# Altium PCB pmu.PcbDoc
Units mil, origin at the board's own origin, x right, y up, seen from the top; angles counter-clockwise.
Board outline 1870 x 900 mil, 2 copper layers (Top Layer, Bottom Layer); 14 components, 9 nets, 38 pads, 0 vias.
Unrouted connection lines stored in the file: 29.
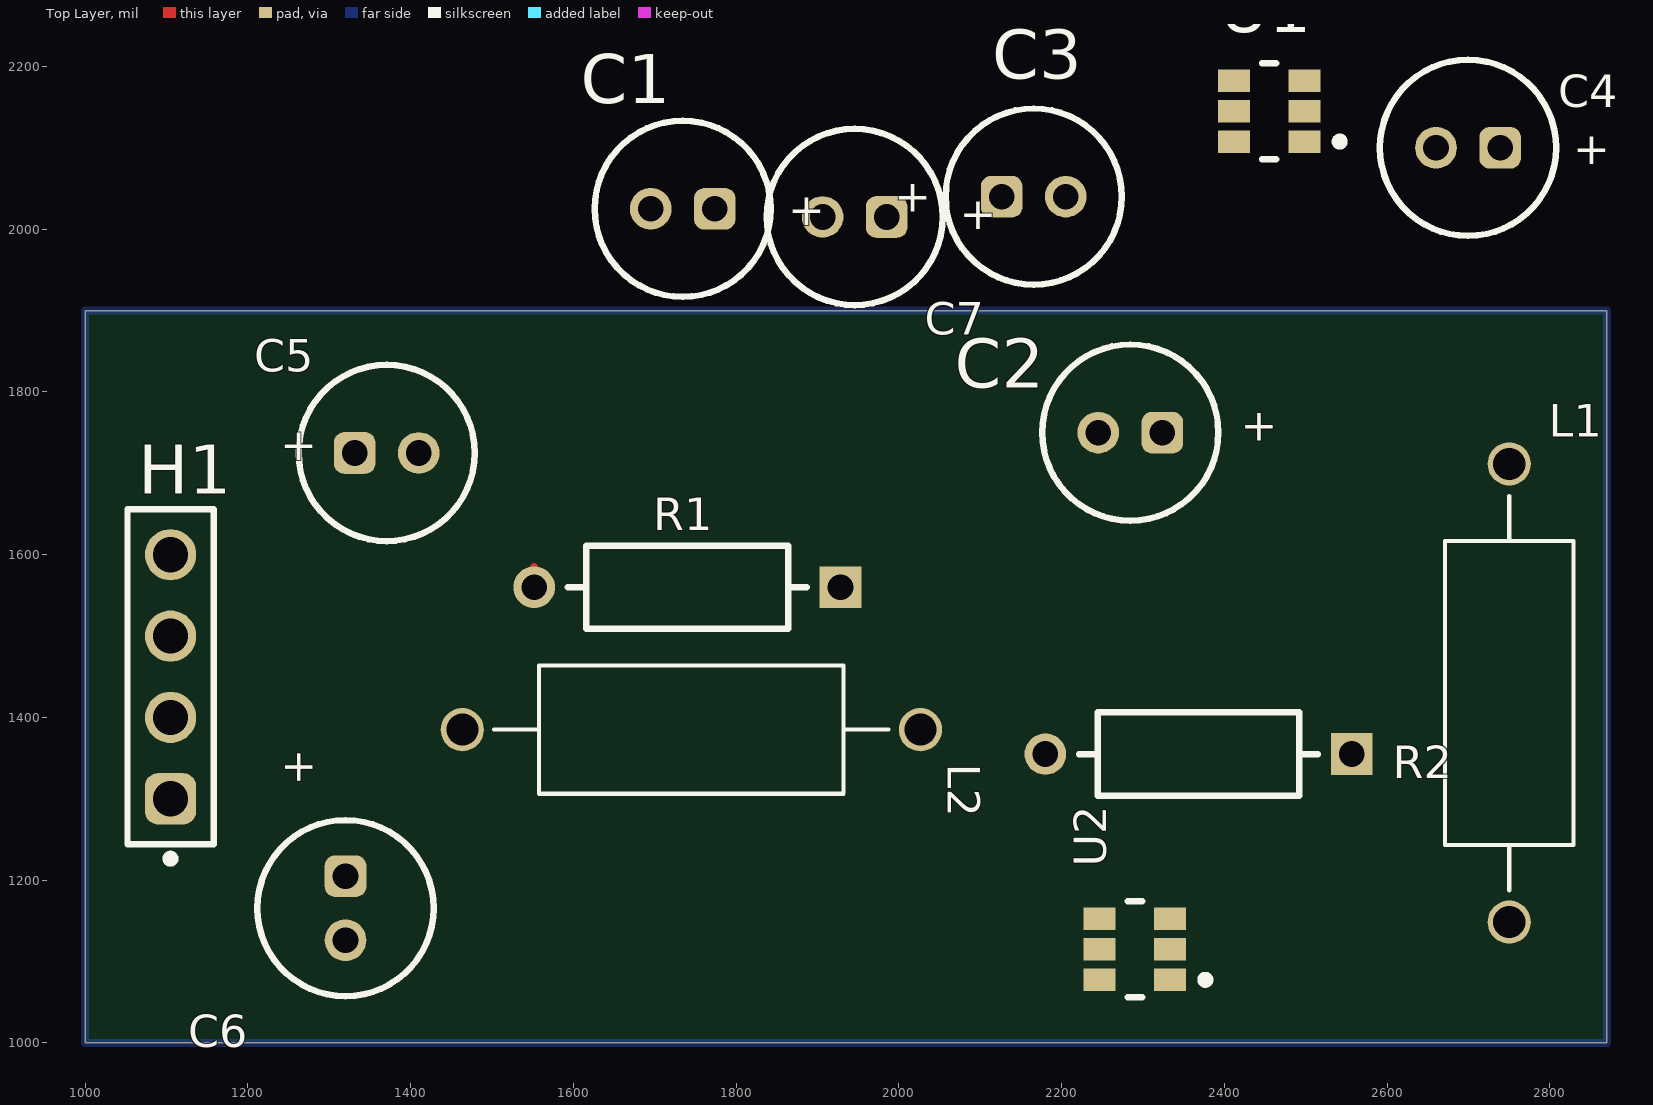
[diagram p0: Top Layer view]
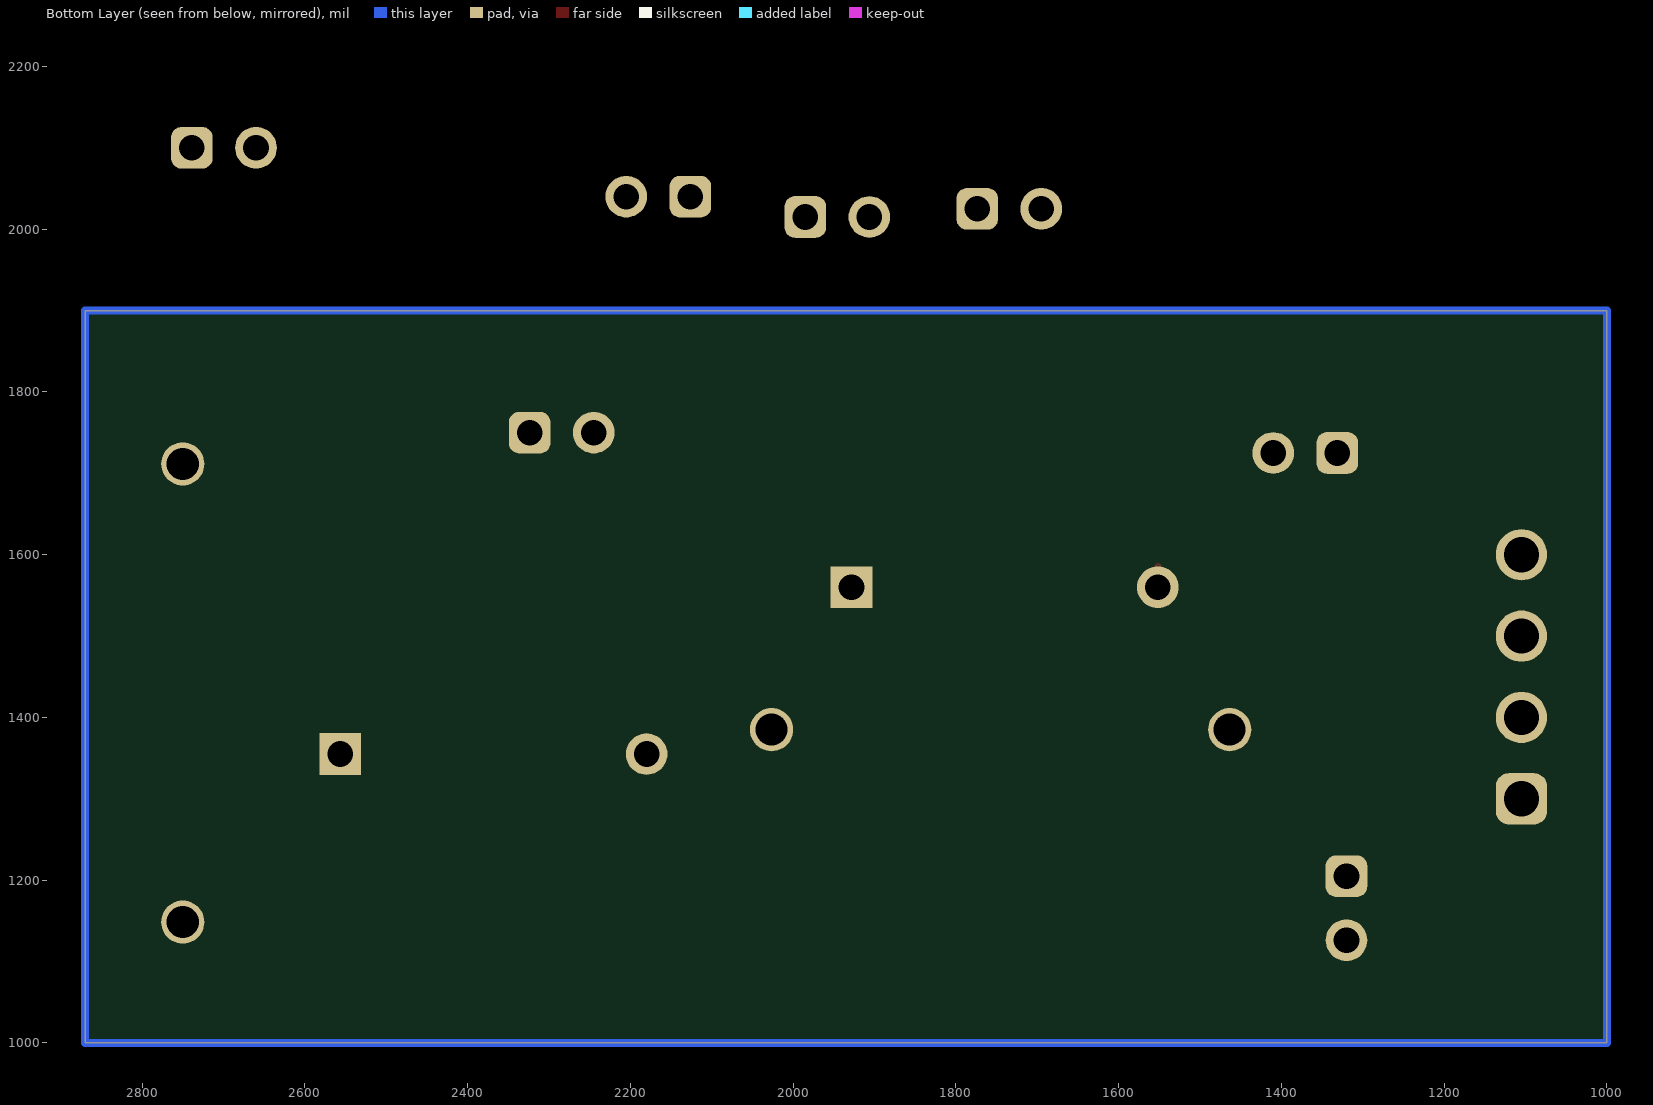
[diagram p1: Bottom Layer view, seen from below]

## Layer stack, top to bottom
Top Solder: solder mask 0.4, Solder Resist, Dk 3.5
Top Layer: signal copper 1.4
Dielectric 1: dielectric 12.6, FR-4, Dk 4.8
Bottom Layer: signal copper 1.4
Bottom Solder: solder mask 0.4, Solder Resist, Dk 3.5

## Board outline
1000,1000 2870,1000 2870,1900 1000,1900

## Design rules (kind name [scope] priority, off if disabled: settings)
Clearance [All] p1: gap=10 ignorepadtopadclearanceinfootprint=FALSE
PolygonConnect [All] p1: connectstyle=Relief reliefconductorwidth=10 reliefentries=4 polygonreliefangle="90 Angle" airgapwidth=10
RoutingVias [All] p1: holewidth=28 width=50 viastyle="Through Hole" minholewidth=28 minwidth=50 maxholewidth=28 maxwidth=50
SolderMaskExpansion [All] p1: expansion=4 istentingtop=FALSE
SupplyNets "Schematic Supply Nets" [InNet('GND')] p1: voltage=0.000
Width [All] p1: maxlimit=10 minlimit=10 preferedwidth=10
30 further rules are at their usual default settings.

## Classes and differential pairs
component class pmu: C1 C2 C3 C4 C5 C6 C7 H1 L1 L2 R1 R2 U1

## Components (designator, comment, footprint, x,y, rotation, side; value= is the part's Value field where it differs from the comment)
C1 "860020672005" WCAP-ATG5_D5H11 51734.37,52025 r0 top
C2 "860020672005" WCAP-ATG5_D5H11 52284.37,51750 r0 top
C3 "860020672005" WCAP-ATG5_D5H11 -47834.37,-47960 r180 top
C4 "860020672005" WCAP-ATG5_D5H11 52699.37,52100 r0 top
C5 "860020672005" WCAP-ATG5_D5H11 -48629.37,-48275 r180 top
C6 "860020672005" WCAP-ATG5_D5H11 -48680,51165.63 r90 top
C7 "860020672005" WCAP-ATG5_D5H11 51945.63,52015 r0 top
H1 "61300411121" 61300411121 1105,1450 r90 top locked
L1 "B78108E1472K009" INDAD1430W80L950D400 2750,1430 r90 top
L2 "B78108E1472K009" INDAD1430W80L950D400 1745,1385 r180 top
R1 "PCF14JT7K50" FP-CF14-MFG 1740,1560 r180 top
R2 "PCF14JT7K50" FP-CF14-MFG 2368.19,1355 r180 top
U1 "AP63205WU-7" FP-TSOT26-MFG 2455,2145 r180 top
U2 "AP63200WU-7" FP-TSOT26-MFG 2290,1115 r180 top

## Footprints (in the part's own frame and the unit in brackets; to place one, negate y for a bottom-side part, rotate by r counter-clockwise, add the part's x,y. Pads: shape width x height; smd on the part's side, far side on the other; paste and mask are expansions set on the pad)
61300411121 [mm] "Pin Header, pitch 2.54 mm, THT, Vertical, single row, 4p"
  rrect50% 1.6x1.6 hole 1.1: 1(-3.81,0)
  round 1.6 hole 1.1: 2(-1.27,0) 3(1.27,0) 4(3.81,0)
  silkscreen extent -5.8,-1.35 5.23,1.35, body extent -5.08,-1.27 5.08,1.27, height 8.57
FP-CF14-MFG [mm]
  rect 1.3x1.3 hole 0.8 paste-2539.97 mask+0: 1(-4.78,0)
  round 1.3 hole 0.8 paste-2539.97 mask+0: 2(4.78,0)
  silkscreen extent -3.73,-1.3 3.73,1.3, body extent -5.53,-1.4 5.53,1.4, height 0.25
FP-TSOT26-MFG [mm]
  rect 1x0.7 smd paste+0 mask+0: 1(-1.099,0.95) 2(-1.099,0) 3(-1.099,-0.95) 4(1.099,-0.95) 5(1.099,0) 6(1.099,0.95)
  silkscreen extent -2.33,-1.5 0.22,1.5, body extent -1.7,-1.6 1.7,1.6, height 0.25
INDAD1430W80L950D400 [mm]
  round 1.35 hole 1: 1(-7.15,0) 2(7.15,0)
  silkscreen extent -6.15,-2 6.15,2, body extent -7.55,-2 7.55,2, height 4
WCAP-ATG5_D5H11 [mm] "Aluminum Electrolytic Capacitors, 5x11mm"
  rrect50% 1.3x1.3 hole 0.8: 1(-1269,-1270)
  round 1.3 hole 0.8: 2(-1271,-1270)
  silkscreen extent -1272.75,-1272.75 -1267.25,-1267.25, body extent -1272.49,-1272.5 -1267.5,-1267.5, height 11.31

## Part data
C1 C2 C3 C4 C5 C6 C7: library part CMP-03913-53914228-1, "860020672005 WCAP-ATG5 Aluminum Electrolytic Capacitors", Capacitance=1µF, Case/Package=Radial, ESR (Equivalent Series Resistance)=39.553Ω, Leakage Current=3µA, Max Operating Temperature=105°C, Min Operating Temperature=-40°C, Ripple Current=13mA, Tolerance=20%, Voltage Rating=50V, Diameter=5mm, Height=11mm, Height - Seated (Max)=12.4968mm, Hole Diameter=800µm, Lead Pitch=2.0066mm, Length=11mm, Life (Hours)=2000hours, Mount="Through Hole", NexarPartId=53914228, Packaging="Tape & Box (TB)", Pitch=2mm, Polarity=Polar, REACH SVHC=Unknown, RoHS=Compliant, Voltage Rating (DC)=50V
H1: "WR-PHD Pin Header, THT, Vertical, pitch 2.54mm, 1 Row, 4P", Contact Resistance=20mOhm, Manufacturer="Wurth Elektronik", Operating Temperature Max=105°C, Operating Temperature Min=-40°C, Rated Current=3A, Withstanding Voltage=500V, Working Voltage=250V, Category="Board-to-Board Connectors", ComponentLink1Description="Website Link", ComponentLink1URL=https://www.we-online.com/redexpert/article/61300411121?ad, ComponentLink2Description="Datasheet Link", ComponentLink2URL=https://www.we-online.com/redexpert/spec/61300411121?ad, Gender="Pin Header", Manufacturer Part Number=61300411121, Match Code=WR-PHD, Mount="Through Hole", Number of Pins=4, Number of Rows=1, Orientation=Vertical, Packaging=Bag, Pitch=2.54mm
L1 L2: "4.7 ÂµH Unshielded Drum Core, Wirewound Inductor 2.75 A 85mOhm Max Axial", Package=None, Check_prices=https://www.snapeda.com/parts/B78108E1472K009/EPCOS/view-part/?ref=eda, Digi-Key_Part_Number=495-76025-1-ND, MF=EPCOS, MP=B78108E1472K009, Purchase-URL=https://pricing.snapeda.com/search/part/B78108E1472K009/?ref=eda, SnapEDA_Link=https://www.snapeda.com/parts/B78108E1472K009/EPCOS/view-part/?ref=snap
R1 R2: library part CMP-26528-000003-1, "RES 7.5K OHM 1/4W 5% AXIAL", Case/Package=Axial, Max Operating Temperature=155°C, Max Power Dissipation=250mW, Min Operating Temperature=-55°C, Resistance=7.5kR, Resistor Type="Carbon Film", Temperature Coefficient=-400ppm/°C, Tolerance=5%, Contact Plating=Tin, Diameter=2.3mm, Features="Flame Retardant Coating", Lead Free="Lead Free", Length=0.256inch, Mount="Through Hole", Number of Terminations=2, Packaging="Tape and Reel", Power Rating=250mW, Radiation Hardening=No, RoHS Compliant=Yes, Series=CF
U1: library part CMP-12757-000001-1, "IC REG BUCK 5V 2A TSOT26", Ambient Temperature Range High=+85°C, Ambient Temperature Range Low=-40°C, Manufacturer="Diodes Inc.", Max Junction Temp=+160°C, Max Supply Voltage=32V, Min Supply Voltage=3.8V, Nominal Supply Current=22uA, Output Current=2A, Output Voltage=5V, Package=TSOT26, Switching Frequency=1100kHz, Temperature="-40°C to +85°C", Automotive=No, Category=IC, ComponentLink2Description=Datasheet, ComponentLink2URL=https://www.diodes.com/assets/Datasheets/AP63200-AP63201-AP63203-AP63205.pdf, Device Class L1="Integrated Circuits (ICs)", Device Class L2="Power Management ICs", Device Class L3="Voltage Regulators - Switching", Digikey Description="IC REG BUCK 5V 2A TSOT26", Footprint Url=https://www.diodes.com/assets/Package-Files/TSOT26.pdf, Height=1mm, Lead Free=Yes, Manufacturer Part Number=AP63205WU-7, Max Duty Cycle=100%, Number Of Outputs=1, Octopart=https://octopart.com/ap63205wu-7-diodes+inc.-98099551, Output Type=Fixed, RoHS=TRUE, Standoff Height=0.01mm, Switching Topology=Buck, Temperature Range High=+85°C, Temperature Range Low=-40°C
U2: library part CMP-12757-000010-1, "IC REG BUCK ADJUSTABLE 2A TSOT26", Ambient Temperature Range High=+85°C, Ambient Temperature Range Low=-40°C, Manufacturer="Diodes Inc.", Max Junction Temp=+160°C, Max Supply Voltage=32V, Min Supply Voltage=3.8V, Nominal Supply Current=22uA, Output Current=2A, Package=TSOT26, Switching Frequency=500kHz, Temperature="-40°C to +85°C", Automotive=No, Category=IC, ComponentLink2Description=Datasheet, ComponentLink2URL=https://www.diodes.com/assets/Datasheets/AP63200-AP63201-AP63203-AP63205.pdf, Device Class L1="Integrated Circuits (ICs)", Device Class L2="Power Management ICs", Device Class L3="Voltage Regulators - Switching", Digikey Description="IC REG BUCK ADJUSTABLE 2A TSOT26", Footprint Url=https://www.diodes.com/assets/Package-Files/TSOT26.pdf, Height=1mm, Ipc Land Pattern Name=SOT95P280X100-6, Lead Free=Yes, Manufacturer Part Number=AP63200WU-7, Mouser Description="AP63200 Series 1.2 V 2 A Adjustable Synchronous Buck Converter - TSOT-26", Number Of Outputs=1, Octopart=https://octopart.com/ap63200wu-7-diodes+inc.-98099548, Output Type=AdjustableProgrammable, RoHS=TRUE, Standoff Height=0.01mm, Switching Topology=Buck, Temperature Range High=+85°C, Temperature Range Low=-40°C

## Nets (pads, with @x,y where several pads share a name; then routed paths per layer and width w, separated by ;. In a path a pad name is that pad's centre, name@x,y a point inside that pad or via, vN(x,y) a via of type N, cw(c..) or ccw(c..) an arc to the next point about the centre after c; other vN are vias at no path point)
GND: C1.2 C2.2 C6.2 C7.2 H1.4 R2.1 U1.4 U2.4
NetC3_1: C3.1 U1.6
NetC3_2: C3.2 L1.1 U1.5
NetC4_1: C4.1 U2.6
NetC4_2: C4.2 L2.1 U2.5
NetC5_2: C5.2 R1.1 R2.2 U2.1
Vin: C1.1 C7.1 H1.3 U1.2 U1.3 U2.2 U2.3
Vout_a: C2.1 H1.1 L1.2 U1.1
Vout_b: C5.1 C6.1 H1.2 L2.2 R1.2 | length 25
  Top Layer w10: R1.2 R1.2@1551.81,1585
copper on no net: | length 5540
  Bottom Layer w10: 1000,1000 2870,1000 2870,1900 1000,1900 1000,1000

## Text inside footprints (layer, text, board x,y; h text height)
C1: Top Overlay "+" at 1863.74,2005 h39.37
C2: Top Overlay "+" at 2420,1740 h39.37
C3: Top Overlay "+" at 2040,2055 h39.37 r180
C4: Top Overlay "+" at 2828.74,2080 h39.37
C5: Top Overlay "+" at 1285,1750 h39.37 r180
C6: Top Overlay "+" at 1280,1316.26 h39.37 r90
C7: Top Overlay "+" at 2075,2000 h39.37